# EAGLE board fCPU (EAGLE 7.6.0)
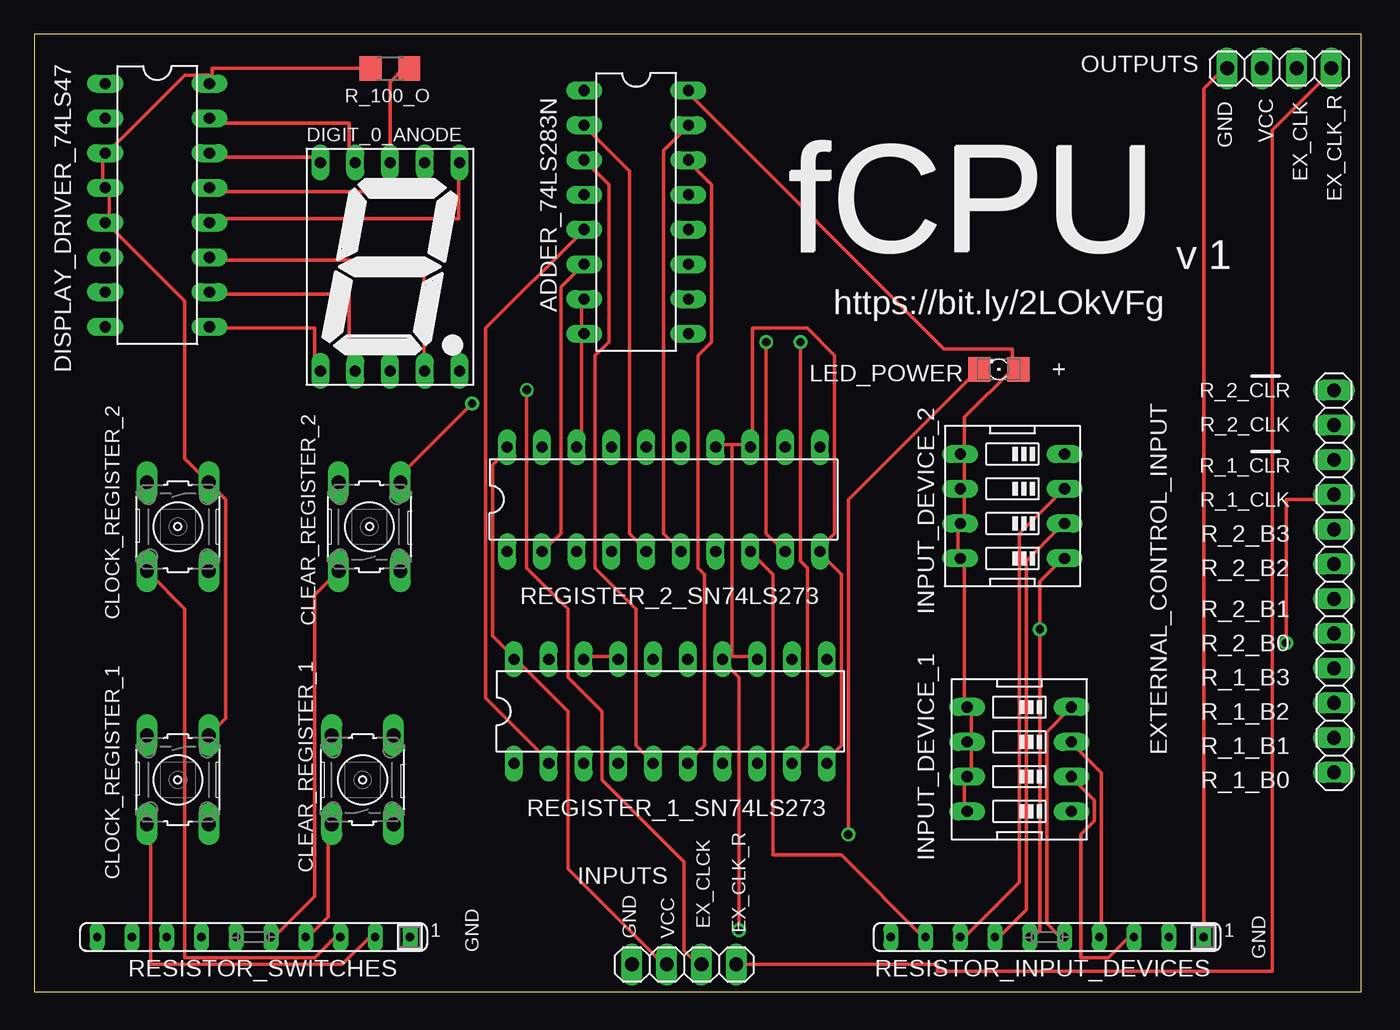
[diagram p0: board, top side]
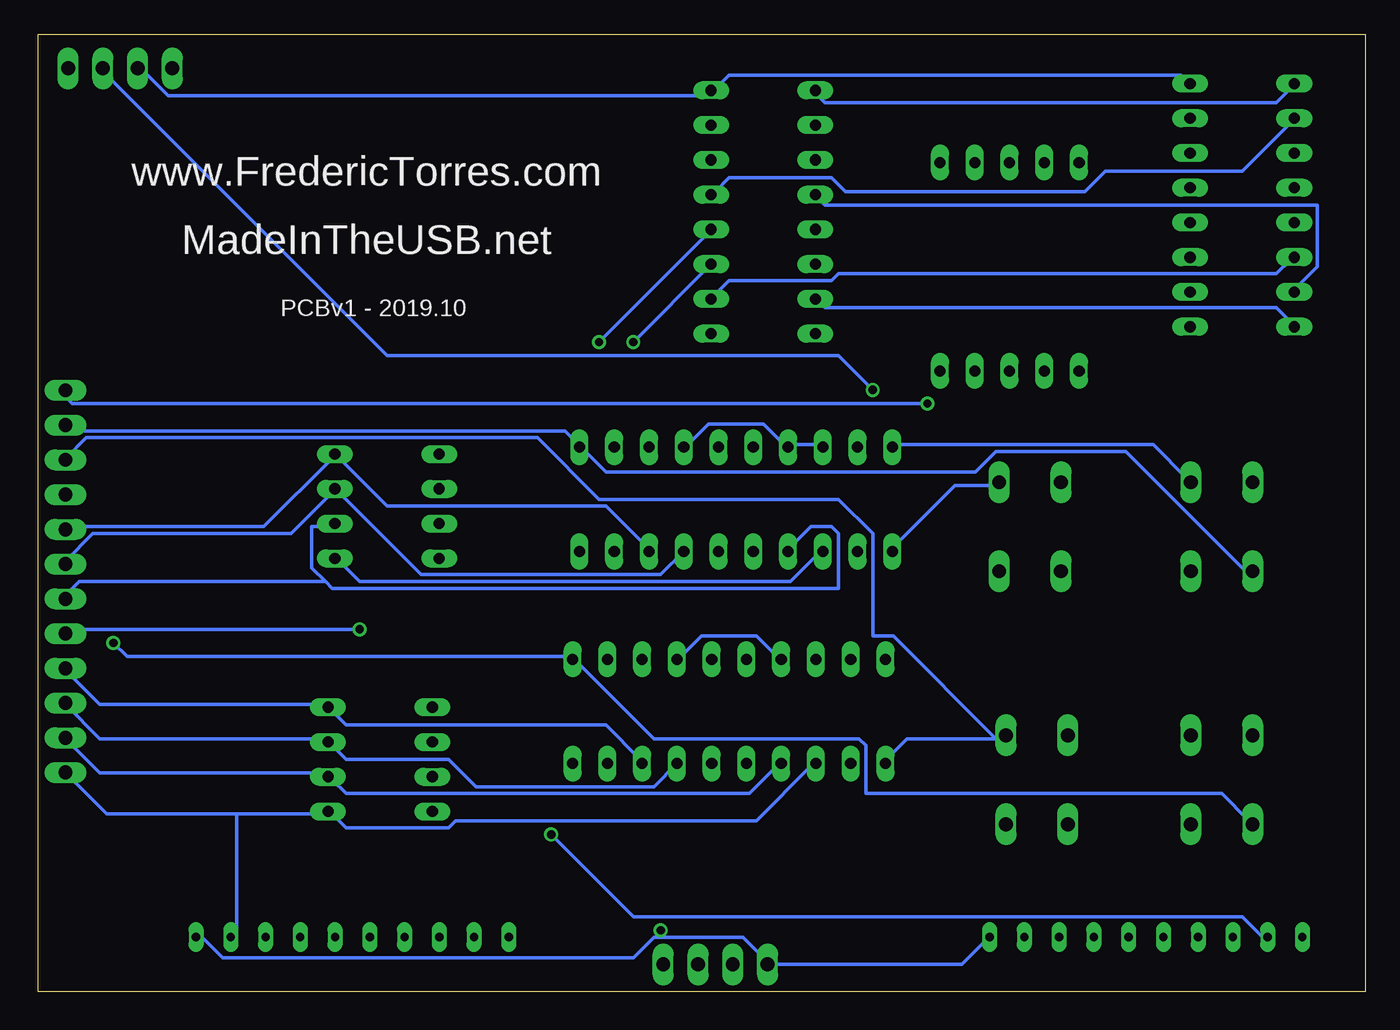
[diagram p1: board, bottom side, seen from below]

Size 97 x 70 mm. Coordinates in mm from the lower left corner, seen from the top.
Outline: 0,0 97,0 97,70 0,70 0,0
Copper layers (1*16): Top 0.035mm / dielectric 1.5mm / Bottom 0.035mm
Design rules "default": minimum track width 10mil, minimum drill 24mil, track to track 8mil, track to pad 8mil, pad to pad 8mil, via to via 8mil, smd to smd 8mil, copper to edge 40mil, drill to drill 8mil, minimum pad ring 10mil, minimum via ring 8mil, stop-mask expansion 4mil, vias tented up to drill 0mil, thermal gap 10mil

## Footprints (pad centres in the part's own frame; a part is rotated, then mirrored left to right if it is on the bottom)
DIL16 = drill 0.813 long: 1 -8.89,-3.81; 2 -6.35,-3.81; 3 -3.81,-3.81; 4 -1.27,-3.81; 5 1.27,-3.81; 6 3.81,-3.81; 7 6.35,-3.81; 8 8.89,-3.81; 9 8.89,3.81; 10 6.35,3.81; 11 3.81,3.81; 12 1.27,3.81; 13 -1.27,3.81; 14 -3.81,3.81; 15 -6.35,3.81; 16 -8.89,3.81
B3F-10XX = drill 1.016 long: 1 -3.251,2.261; 2 3.251,2.261; 3 -3.251,-2.261; 4 3.251,-2.261
7SEG-13 = drill 0.813 long: 1 -5.08,-7.62; 2 -2.54,-7.62; 3 0,-7.62; 4 2.54,-7.62; 5 5.08,-7.62; 6 5.08,7.62; 7 2.54,7.62; 8 0,7.62; 9 -2.54,7.62; 10 -5.08,7.62
1X12 = drill 1.016 long: 1 -13.97,0; 2 -11.43,0; 3 -8.89,0; 4 -6.35,0; 5 -3.81,0; 6 -1.27,0; 7 1.27,0; 8 3.81,0; 9 6.35,0; 10 8.89,0; 11 11.43,0; 12 13.97,0
EDG-04 = drill 0.813 long: 1 -3.81,-3.81; 2 -1.27,-3.81; 3 1.27,-3.81; 4 3.81,-3.81; 5 3.81,3.81; 6 1.27,3.81; 7 -1.27,3.81; 8 -3.81,3.81
1X04 = drill 1.016 long: 1 -3.81,0; 2 -1.27,0; 3 1.27,0; 4 3.81,0
1206 = smd 1.6 x 1.803: A -1.422,0; C 1.422,0
R1206 = smd 1.6 x 1.803: 1 -1.422,0; 2 1.422,0
DIL20 = drill 0.813 long: 1 -11.43,-3.81; 2 -8.89,-3.81; 3 -6.35,-3.81; 4 -3.81,-3.81; 5 -1.27,-3.81; 6 1.27,-3.81; 7 3.81,-3.81; 8 6.35,-3.81; 9 8.89,-3.81; 10 11.43,-3.81; 11 11.43,3.81; 12 8.89,3.81; 13 6.35,3.81; 14 3.81,3.81; 15 1.27,3.81; 16 -1.27,3.81; 17 -3.81,3.81; 18 -6.35,3.81; 19 -8.89,3.81; 20 -11.43,3.81
SIP10 = drill 0.6 long: 1 -11.46,0; 2 -8.92,0; 3 -6.38,0; 4 -3.84,0; 5 -1.3,0; 6 1.24,0; 7 3.78,0; 8 6.32,0; 9 8.86,0; 10 11.4,0

## Placement (x,y rotation side)
ADDER_74LS283N  74LS283N  [DIL16]  44,57 270 top
CLEAR_REGISTER_1  [B3F-10XX]  24,15.5 90 top
CLEAR_REGISTER_2  [B3F-10XX]  24.5,34 90 top
CLOCK_REGISTER_1  [B3F-10XX]  10.5,15.5 270 top
CLOCK_REGISTER_2  [B3F-10XX]  10.5,34 270 top
DIGIT_0_ANODE  [7SEG-13]  26,53 0 top
DISPLAY_DRIVER_74LS47  74LS47N  [DIL16]  9,57.5 270 top
EXTERNAL_CONTROL_INPUT  [1X12]  95,30 90 top
INPUT_DEVICE_1  [EDG-04]  72,17 90 top
INPUT_DEVICE_2  [EDG-04]  71.5,35.5 90 top
JP_CLOCK_IN  [1X04]  47.5,2 0 top
LED_POWER  [1206]  70.5,45.5 180 top
OUTPUTS  [1X04]  91,67.5 0 top
R_100_O  [R1206]  26,67.5 180 top
REGISTER_1_SN74LS273  74273N  [DIL20]  46.5,20.5 0 top
REGISTER_2_SN74LS273  74273N  [DIL20]  46,36 0 top
RESISTOR_INPUT_DEVICES  [SIP10]  74,4 180 top
RESISTOR_SWITCHES  [SIP10]  16,4 180 top

## Library data of the parts
ADDER_74LS283N DISPLAY_DRIVER_74LS47 REGISTER_1_SN74LS273 REGISTER_2_SN74LS273 = 74xx-us
CLEAR_REGISTER_1 CLEAR_REGISTER_2 CLOCK_REGISTER_1 CLOCK_REGISTER_2 = switch-omron; MPN: B3F-1000; OC_FARNELL: 176432; OC_NEWARK: 36M3542
DIGIT_0_ANODE INPUT_DEVICE_1 INPUT_DEVICE_2 = special
EXTERNAL_CONTROL_INPUT LED_POWER R_100_O = adafruit
JP_CLOCK_IN OUTPUTS = pinhead
RESISTOR_INPUT_DEVICES RESISTOR_SWITCHES = resistor-sip

## Nets
CLEAR_REGISTER_1_TO_GND: CLEAR_REGISTER_1.1 RESISTOR_SWITCHES.4
CLEAR_REGISTER_2_TO_GND: CLEAR_REGISTER_2.1 RESISTOR_SWITCHES.5
DTA_BUS_0: ADDER_74LS283N.4 DISPLAY_DRIVER_74LS47.7
DTA_BUS_1: ADDER_74LS283N.1 DISPLAY_DRIVER_74LS47.1
DTA_BUS_2: ADDER_74LS283N.13 DISPLAY_DRIVER_74LS47.2
DTA_BUS_3: ADDER_74LS283N.10 DISPLAY_DRIVER_74LS47.6
GND: ADDER_74LS283N.7 ADDER_74LS283N.8 DISPLAY_DRIVER_74LS47.8 JP_CLOCK_IN.1 OUTPUTS.1 REGISTER_1_SN74LS273.10 REGISTER_1_SN74LS273.13 REGISTER_1_SN74LS273.14 REGISTER_1_SN74LS273.17 REGISTER_1_SN74LS273.18 REGISTER_2_SN74LS273.10 REGISTER_2_SN74LS273.13 REGISTER_2_SN74LS273.14 REGISTER_2_SN74LS273.17 REGISTER_2_SN74LS273.18 RESISTOR_INPUT_DEVICES.1 RESISTOR_SWITCHES.1
LED_POWER_TO_GND: LED_POWER.C RESISTOR_SWITCHES.9
N$1: DIGIT_0_ANODE.8 R_100_O.1
REGISTER_1_CLK: CLOCK_REGISTER_1.4 EXTERNAL_CONTROL_INPUT.9 REGISTER_1_SN74LS273.11 RESISTOR_SWITCHES.2
REGISTER_1_CLR: CLEAR_REGISTER_1.4 EXTERNAL_CONTROL_INPUT.10 REGISTER_1_SN74LS273.1
REGISTER_1_IN_BIT_0: EXTERNAL_CONTROL_INPUT.1 INPUT_DEVICE_1.1 REGISTER_1_SN74LS273.3 RESISTOR_INPUT_DEVICES.2
REGISTER_1_IN_BIT_1: EXTERNAL_CONTROL_INPUT.2 INPUT_DEVICE_1.2 REGISTER_1_SN74LS273.4 RESISTOR_INPUT_DEVICES.3
REGISTER_1_IN_BIT_2: EXTERNAL_CONTROL_INPUT.3 INPUT_DEVICE_1.3 REGISTER_1_SN74LS273.7 RESISTOR_INPUT_DEVICES.4
REGISTER_1_IN_BIT_3: EXTERNAL_CONTROL_INPUT.4 INPUT_DEVICE_1.4 REGISTER_1_SN74LS273.8 RESISTOR_INPUT_DEVICES.5
REGISTER_1_OUT_BIT_0: ADDER_74LS283N.5 REGISTER_1_SN74LS273.2
REGISTER_1_OUT_BIT_1: ADDER_74LS283N.3 REGISTER_1_SN74LS273.5
REGISTER_1_OUT_BIT_2: ADDER_74LS283N.14 REGISTER_1_SN74LS273.6
REGISTER_1_OUT_BIT_3: ADDER_74LS283N.12 REGISTER_1_SN74LS273.9
REGISTER_2_CLK: CLOCK_REGISTER_2.4 EXTERNAL_CONTROL_INPUT.11 REGISTER_2_SN74LS273.11 RESISTOR_SWITCHES.3
REGISTER_2_CLR: CLEAR_REGISTER_2.4 EXTERNAL_CONTROL_INPUT.12 REGISTER_2_SN74LS273.1
REGISTER_2_IN_BIT_0: EXTERNAL_CONTROL_INPUT.5 INPUT_DEVICE_2.1 REGISTER_2_SN74LS273.3 RESISTOR_INPUT_DEVICES.6
REGISTER_2_IN_BIT_1: EXTERNAL_CONTROL_INPUT.6 INPUT_DEVICE_2.2 REGISTER_2_SN74LS273.4 RESISTOR_INPUT_DEVICES.7
REGISTER_2_IN_BIT_2: EXTERNAL_CONTROL_INPUT.7 INPUT_DEVICE_2.3 REGISTER_2_SN74LS273.7 RESISTOR_INPUT_DEVICES.8
REGISTER_2_IN_BIT_3: EXTERNAL_CONTROL_INPUT.8 INPUT_DEVICE_2.4 REGISTER_2_SN74LS273.8 RESISTOR_INPUT_DEVICES.9
REGISTER_2_OUT_BIT_0: ADDER_74LS283N.6 REGISTER_2_SN74LS273.2
REGISTER_2_OUT_BIT_1: ADDER_74LS283N.2 REGISTER_2_SN74LS273.5
REGISTER_2_OUT_BIT_2: ADDER_74LS283N.15 REGISTER_2_SN74LS273.6
REGISTER_2_OUT_BIT_3: ADDER_74LS283N.11 REGISTER_2_SN74LS273.9
SEG_1_DA: DIGIT_0_ANODE.7 DISPLAY_DRIVER_74LS47.13
SEG_1_DB: DIGIT_0_ANODE.6 DISPLAY_DRIVER_74LS47.12
SEG_1_DC: DIGIT_0_ANODE.4 DISPLAY_DRIVER_74LS47.11
SEG_1_DD: DIGIT_0_ANODE.2 DISPLAY_DRIVER_74LS47.10
SEG_1_DE: DIGIT_0_ANODE.1 DISPLAY_DRIVER_74LS47.9
SEG_1_DF: DIGIT_0_ANODE.9 DISPLAY_DRIVER_74LS47.15
SEG_1_DG: DIGIT_0_ANODE.10 DISPLAY_DRIVER_74LS47.14
TMR555_OUTPUT: JP_CLOCK_IN.3 OUTPUTS.3
TMR555_OUTPUT_REVERSE: JP_CLOCK_IN.4 OUTPUTS.4
VCC: ADDER_74LS283N.16 CLOCK_REGISTER_1.1 CLOCK_REGISTER_2.1 DISPLAY_DRIVER_74LS47.3 DISPLAY_DRIVER_74LS47.4 DISPLAY_DRIVER_74LS47.5 DISPLAY_DRIVER_74LS47.16 INPUT_DEVICE_1.5 INPUT_DEVICE_1.6 INPUT_DEVICE_1.7 INPUT_DEVICE_1.8 INPUT_DEVICE_2.5 INPUT_DEVICE_2.6 INPUT_DEVICE_2.7 INPUT_DEVICE_2.8 JP_CLOCK_IN.2 LED_POWER.A OUTPUTS.2 R_100_O.2 REGISTER_1_SN74LS273.20 REGISTER_2_SN74LS273.20

## Tracks (layer width: path | path; a pad name or v marks a point on that pad's centre or on a via)
CLEAR_REGISTER_1_TO_GND
  Top 0.254: RESISTOR_SWITCHES.4 20,4 21.5,5.5 21.5,12 CLEAR_REGISTER_1.1
CLEAR_REGISTER_2_TO_GND
  Top 0.254: RESISTOR_SWITCHES.5 17.5,4 20.5,7 20.5,29 22,30.5 CLEAR_REGISTER_2.1
DTA_BUS_0
  Bottom 0.254: DISPLAY_DRIVER_74LS47.7 5,51.5 3.5,53 3.5,57.5 39.5,57.5 40,58 ADDER_74LS283N.4
DTA_BUS_1
  Bottom 0.254: DISPLAY_DRIVER_74LS47.1 5.5,66 6.5,65 39.5,65 40,65.5 ADDER_74LS283N.1
DTA_BUS_2
  Bottom 0.254: DISPLAY_DRIVER_74LS47.2 5.5,63.5 9,60 19,60 20.5,58.5 38,58.5 39,59.5 46.5,59.5 47.5,58.5 ADDER_74LS283N.13
DTA_BUS_3
  Bottom 0.254: DISPLAY_DRIVER_74LS47.6 5.5,53.5 6.5,52.5 38.5,52.5 39,52 46.5,52 47.5,51 ADDER_74LS283N.10
GND  (via drill 0.61)
  Top 0.254: REGISTER_1_SN74LS273.10 58,17 59,18 59,30.5 57.5,32 REGISTER_2_SN74LS273.10 57.5,32.5 58.5,33.5 58.5,46.5 56.5,48.5 52.5,48.5 52.5,40 REGISTER_2_SN74LS273.13 52,40 51,40 | REGISTER_1_SN74LS273.18 40.5,24.5 42.5,24.5 REGISTER_1_SN74LS273.17 | 51,24.5 52.5,24.5 REGISTER_1_SN74LS273.13 | 51,24.5 50.5,24.5 REGISTER_1_SN74LS273.14 50.5,24 51.5,23 v51.5,4.5 | 51,40 50,40 REGISTER_2_SN74LS273.14 | ADDER_74LS283N.7 40,50.5 40,48.5 ADDER_74LS283N.8 40,48 40,40 REGISTER_2_SN74LS273.18 | 51,40 51,24.5 | OUTPUTS.1 87,67.5 85.5,66 85.5,4 RESISTOR_INPUT_DEVICES.1
  Bottom 0.254: REGISTER_1_SN74LS273.17 43,24.5 44.5,26 48.5,26 50,24.5 REGISTER_1_SN74LS273.14 | REGISTER_2_SN74LS273.18 40,40 42,40 REGISTER_2_SN74LS273.17 42.5,40 44,41.5 48,41.5 49.5,40 REGISTER_2_SN74LS273.14 | DISPLAY_DRIVER_74LS47.8 5.5,49 6.5,50 39.5,50 40,50.5 ADDER_74LS283N.7 | 43.5,2 29.5,2 27.5,4 RESISTOR_SWITCHES.1 | 51.5,4 45.5,4 43.5,2 | 51.5,4 52,4 53.5,2.5 83.5,2.5 85,4 RESISTOR_INPUT_DEVICES.1 | 43.5,2 JP_CLOCK_IN.1 | 51.5,4 v51.5,4.5
LED_POWER_TO_GND  (via drill 0.61)
  Top 0.254: v59.5,11.5 59.5,36 69,45.5 LED_POWER.C
  Bottom 0.254: v59.5,11.5 53.5,5.5 9,5.5 7.5,4 RESISTOR_SWITCHES.9
N$1
  Top 0.254: DIGIT_0_ANODE.8 26,66.5 27,67.5 R_100_O.1
REGISTER_1_CLK  (via drill 0.61)
  Top 0.254: RESISTOR_SWITCHES.2 24.5,4 22.5,2 8.5,2 8.5,12 CLOCK_REGISTER_1.4 | v91.5,25.5 91.5,36 95,36 EXTERNAL_CONTROL_INPUT.9
  Bottom 0.254: CLOCK_REGISTER_1.4 8.5,12.5 10.5,14.5 36.5,14.5 36.5,18 37,18.5 52,18.5 57.5,24 REGISTER_1_SN74LS273.11 58,24.5 90.5,24.5 v91.5,25.5
REGISTER_1_CLR
  Bottom 0.254: 27,18.5 26.5,18.5 CLEAR_REGISTER_1.4 27,18.5 | 27,18.5 33.5,18.5 35,17 REGISTER_1_SN74LS273.1 | 27,18.5 34.5,26 36,26 36,33.5 38.5,36 56,36 60.5,40.5 93.5,40.5 95,39 EXTERNAL_CONTROL_INPUT.10
REGISTER_1_IN_BIT_0
  Bottom 0.254: 82.5,13 82.5,4 RESISTOR_INPUT_DEVICES.2 | 82.5,13 76,13 INPUT_DEVICE_1.1 75.5,13 74.5,12 67,12 66.5,12.5 44.5,12.5 40.5,16.5 REGISTER_1_SN74LS273.3 | 82.5,13 92,13 95,16 EXTERNAL_CONTROL_INPUT.1
REGISTER_1_IN_BIT_1
  Top 0.254: RESISTOR_INPUT_DEVICES.3 80,4 78.5,2.5 76.5,2.5 76.5,11.5 77.5,12.5 77.5,14 76,15.5 INPUT_DEVICE_1.2
  Bottom 0.254: REGISTER_1_SN74LS273.4 43,16.5 45,14.5 74.5,14.5 75.5,15.5 INPUT_DEVICE_1.2 76,16 92.5,16 95,18.5 EXTERNAL_CONTROL_INPUT.2
REGISTER_1_IN_BIT_2
  Top 0.254: RESISTOR_INPUT_DEVICES.4 78,4 78,16 76,18 INPUT_DEVICE_1.3
  Bottom 0.254: REGISTER_1_SN74LS273.7 52,15 65,15 67,17 74.5,17 75.5,18 INPUT_DEVICE_1.3 76,18.5 92.5,18.5 95,21 EXTERNAL_CONTROL_INPUT.3
REGISTER_1_IN_BIT_3
  Top 0.254: INPUT_DEVICE_1.4 74,19 74,5 75,4 RESISTOR_INPUT_DEVICES.5
  Bottom 0.254: REGISTER_1_SN74LS273.8 53,17 55.5,19.5 74.5,19.5 INPUT_DEVICE_1.4 76,21 92.5,21 95,23.5 EXTERNAL_CONTROL_INPUT.4
REGISTER_1_OUT_BIT_0
  Top 0.254: REGISTER_1_SN74LS273.2 37.5,17 33,21.5 33,48.5 40,55.5 ADDER_74LS283N.5
REGISTER_1_OUT_BIT_1
  Top 0.254: ADDER_74LS283N.3 42,59 42,47.5 41,46.5 41,31 44,28 44,18 45,17 REGISTER_1_SN74LS273.5
REGISTER_1_OUT_BIT_2
  Top 0.254: REGISTER_1_SN74LS273.6 48,17 49,18 49,30.5 48.5,31 48.5,46.5 49.5,47.5 49.5,59 48,60.5 ADDER_74LS283N.14
REGISTER_1_OUT_BIT_3  (via drill 0.61)
  Top 0.254: v56,47.5 56,31.5 56.5,31 56.5,18 55.5,17 REGISTER_1_SN74LS273.9
  Bottom 0.254: v56,47.5 48,55.5 ADDER_74LS283N.12
REGISTER_2_CLK
  Top 0.254: RESISTOR_SWITCHES.3 22,4 20.5,2.5 11,2.5 11,28 8.5,30.5 CLOCK_REGISTER_2.4
  Bottom 0.254: EXTERNAL_CONTROL_INPUT.11 95,41 58.5,41 57.5,40 REGISTER_2_SN74LS273.11 57,39.5 55.5,38 28.5,38 27,39.5 17.5,39.5 9,31 8.5,31 CLOCK_REGISTER_2.4
REGISTER_2_CLR  (via drill 0.61)
  Top 0.254: v32,43 27,38 27,37.5 CLEAR_REGISTER_2.4
  Bottom 0.254: REGISTER_2_SN74LS273.1 34.5,32.5 30,37 27,37 CLEAR_REGISTER_2.4 | v32,43 94.5,43 95,43.5 EXTERNAL_CONTROL_INPUT.12
REGISTER_2_IN_BIT_0  (via drill 0.61)
  Top 0.254: RESISTOR_INPUT_DEVICES.6 73,4 73.5,4.5 v73.5,26.5 73.5,30 75,31.5 INPUT_DEVICE_2.1
  Bottom 0.254: REGISTER_2_SN74LS273.3 40,32 42,30 73.5,30 75,31.5 INPUT_DEVICE_2.1 | v73.5,26.5 95,26.5 EXTERNAL_CONTROL_INPUT.5
REGISTER_2_IN_BIT_1
  Top 0.254: RESISTOR_INPUT_DEVICES.7 70.5,4 72.5,6 72.5,31.5 75,34 INPUT_DEVICE_2.2
  Bottom 0.254: 76,30 77,31 77,34 75.5,34 INPUT_DEVICE_2.2 | 76,30 75.5,29.5 38.5,29.5 38.5,33.5 39,34 40.5,34 42,32.5 REGISTER_2_SN74LS273.4 | 76,30 94,30 95,29 EXTERNAL_CONTROL_INPUT.6
REGISTER_2_IN_BIT_2
  Top 0.254: RESISTOR_INPUT_DEVICES.8 68,4 72,8 72,33.5 75,36.5 INPUT_DEVICE_2.3
  Bottom 0.254: REGISTER_2_SN74LS273.7 51.5,30.5 69,30.5 75,36.5 INPUT_DEVICE_2.3 75.5,36.5 78.5,33.5 93,33.5 95,31.5 EXTERNAL_CONTROL_INPUT.7
REGISTER_2_IN_BIT_3
  Top 0.254: RESISTOR_INPUT_DEVICES.9 65,4 59,10 54,10 54,30.5 52.5,32 REGISTER_2_SN74LS273.8
  Bottom 0.254: EXTERNAL_CONTROL_INPUT.8 95,34 80.5,34 75.5,39 INPUT_DEVICE_2.4 71.5,35.5 55.5,35.5 52.5,32.5 REGISTER_2_SN74LS273.8
REGISTER_2_OUT_BIT_0
  Top 0.254: ADDER_74LS283N.6 38.5,51.5 38.5,33.5 37.5,32.5 REGISTER_2_SN74LS273.2
REGISTER_2_OUT_BIT_1
  Top 0.254: REGISTER_2_SN74LS273.5 44.5,32.5 43.5,33.5 43.5,60 40.5,63 ADDER_74LS283N.2
REGISTER_2_OUT_BIT_2
  Top 0.254: REGISTER_2_SN74LS273.6 47,32.5 46,33.5 46,61.5 47.5,63 ADDER_74LS283N.15
REGISTER_2_OUT_BIT_3  (via drill 0.61)
  Top 0.254: v53.5,47.5 53.5,33.5 54.5,32.5 REGISTER_2_SN74LS273.9
  Bottom 0.254: ADDER_74LS283N.11 v53.5,47.5
SEG_1_DA
  Top 0.254: DISPLAY_DRIVER_74LS47.13 13,58.5 28.5,58.5 28.5,60.5 DIGIT_0_ANODE.7
SEG_1_DB
  Top 0.254: DISPLAY_DRIVER_74LS47.12 13,56.5 31,56.5 31,60.5 DIGIT_0_ANODE.6
SEG_1_DC
  Top 0.254: DISPLAY_DRIVER_74LS47.11 13,53.5 28.5,53.5 28.5,45.5 DIGIT_0_ANODE.4
SEG_1_DD
  Top 0.254: DISPLAY_DRIVER_74LS47.10 13,51 23,51 23,45.5 DIGIT_0_ANODE.2
SEG_1_DE
  Top 0.254: DISPLAY_DRIVER_74LS47.9 13,48.5 20.5,48.5 20.5,45.5 DIGIT_0_ANODE.1
SEG_1_DF
  Top 0.254: DISPLAY_DRIVER_74LS47.15 13,63.5 23,63.5 23,61 DIGIT_0_ANODE.9
SEG_1_DG
  Top 0.254: DISPLAY_DRIVER_74LS47.14 13,61 20.5,61 DIGIT_0_ANODE.10
TMR555_OUTPUT  (via drill 0.61)
  Top 0.254: v36,44 36,31 39,28 39,23 41.5,20.5 41.5,15.5 47.5,9.5 47.5,3 48.5,2 JP_CLOCK_IN.3
  Bottom 0.254: v36,44 38.5,46.5 71.5,46.5 92.5,67.5 OUTPUTS.3
TMR555_OUTPUT_REVERSE
  Top 0.254: JP_CLOCK_IN.4 66,2 66,1.5 90.5,1.5 90.5,63 94.5,67 94.5,67.5 OUTPUTS.4
VCC
  Top 0.254: INPUT_DEVICE_1.8 68,13.5 68,15.5 INPUT_DEVICE_1.7 68.5,16 68.5,18 INPUT_DEVICE_1.6 68.5,18.5 68.5,20.5 INPUT_DEVICE_1.5 68,21 68,31.5 INPUT_DEVICE_2.8 67.5,32 67.5,34 INPUT_DEVICE_2.7 68,34.5 68,36.5 INPUT_DEVICE_2.6 68,37 68,39 INPUT_DEVICE_2.5 68,39.5 68,42 71.5,45.5 | 71.5,45.5 71.5,47 66.5,47 48,65.5 ADDER_74LS283N.16 | 71.5,45.5 LED_POWER.A | R_100_O.2 13,67.5 13,67 | 13,67 13,66.5 DISPLAY_DRIVER_74LS47.16 13,67 | 13,67 11,67 5.5,61.5 DISPLAY_DRIVER_74LS47.3 5,61 5,59 DISPLAY_DRIVER_74LS47.4 5.5,58.5 5.5,56.5 DISPLAY_DRIVER_74LS47.5 5.5,56 11,50.5 11,39 12.5,37.5 CLOCK_REGISTER_2.1 13,37 14,36 14,20 13,19 CLOCK_REGISTER_1.1 | REGISTER_2_SN74LS273.20 34.5,39.5 33.5,38.5 33.5,26 35,24.5 REGISTER_1_SN74LS273.20 35.5,24 39,20.5 39,9 46,2 JP_CLOCK_IN.2
  Bottom 0.254: OUTPUTS.2 89.5,67.5 87.5,65.5 48,65.5 ADDER_74LS283N.16 47.5,66 46.5,67 13.5,67 13,66.5 DISPLAY_DRIVER_74LS47.16 | CLOCK_REGISTER_2.1 13,37.5 15.5,40 34.5,40 REGISTER_2_SN74LS273.20

## Text on the board
tNames: VCC | GND | EX_CLK | EX_CLK_R | fCPU | fCPU | v 1 | https://bit.ly/2LOkVFg | + | R_2_CLR | R_2_CLK | R_1_CLR | R_1_CLK | R_2_B3 | R_2_B2 | R_2_B1 | R_2_B0 | R_1_B3 | R_1_B2 | R_1_B1 | R_1_B0 | INPUTS | EX_CLCK | EX_CLK_R | GND | VCC | GND | GND
bNames: www.FredericTorres.com | MadeInTheUSB.net | PCBv1 - 2019.10